# Altium PCB W040 24011506-06PBS PCB.PcbDoc (part 3 of 3)
Units mil, origin at the board's own origin, x right, y up, seen from the top; angles counter-clockwise.
Board outline 4320.55 x 590.55 mil, 4 copper layers (Top Layer, MidLayer1, MidLayer2, Bottom Layer); 218 components, 121 nets, 685 pads, 487 vias.
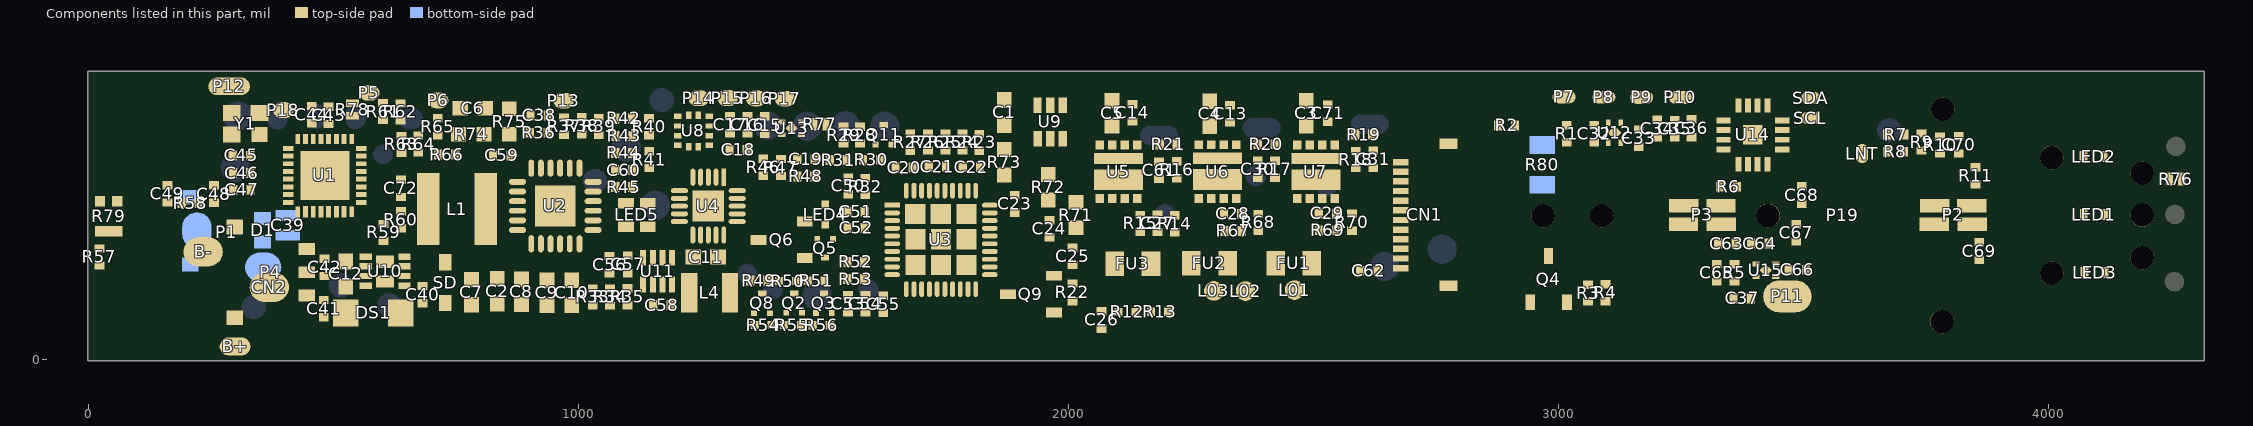
[diagram p5: the components of this part, seen from the top]

## Polygon pours and split planes (outlines as drawn)
GND on Top Layer "Top Layer-GND" (hatched 90Degree grid 4 track 4, remove dead copper, pour order 50): 1998.43,11.44 1768.45,11.44 cw(c1768.45,25.31) 1758.64,15.5 1758.64,38.25 ccw(c1748.68,38.25) 1755.73,45.29 1753.04,47.98 ccw(c1747.7,42.64) 1747.7,50.19 1600.82,50.19 ccw(c1600.82,37.38) 1591.77,46.44 ccw(c1598.81,39.4) 1588.85,39.4 1588.85,30.19 1588.85,18.97 cw(c1581.74,18.97) 1586.77,13.94 cw(c1582.74,17.96) 1582.74,12.27 1570.1,12.27 720.63,12.27 cw(c720.63,28.63) 709.06,17.06 cw(c713.59,21.59) 707.18,21.59 707.18,30.81 707.18,44.72 ccw(c684.42,44.72) 700.52,60.81 655.4,60.81 ccw(c655.4,39.47) 640.31,54.56 ccw(c641.31,53.56) 639.89,53.56 639.89,18.73 cw(c631.84,18.73) 637.53,13.04 635.93,11.44 504.22,11.44 cw(c504.22,21.4) 497.18,14.35 497.18,37.21 ccw(c482.96,37.21) 493.02,47.27 489.86,50.43 cw(c491.28,51.85) 489.27,51.85 344.7,51.85 ccw(c344.7,27.67) 327.6,44.77 327.6,23.72 cw(c319.06,23.72) 325.1,17.69 cw(c312.02,30.77) 312.02,12.27 311.35,12.27 281.72,12.27 cw(c281.72,22.23) 274.68,15.19 cw(c282.73,23.24) 271.35,23.24 271.35,40.19 271.35,163.76 ccw(c249.3,163.76) 264.89,179.35 24.25,179.35 cw(c24.25,196.43) 12.18,184.35 12.18,194.81 cw(c22.14,194.81) 15.1,201.85 159.34,201.85 ccw(c159.34,204.7) 161.35,202.69 161.35,339.77 161.35,387.24 ccw(c154.24,387.24) 159.27,392.27 32.87,392.27 ccw(c32.87,386.58) 28.85,390.6 cw(c25.83,387.59) 30.1,387.59 30.1,339.77 30.1,320.46 ccw(c35.79,320.46) 31.77,316.44 20.2,316.44 cw(c20.2,320.71) 17.18,317.69 ccw(c13.16,321.71) 18.85,321.71 18.85,377.27 18.85,390.26 ccw(c16,390.26) 18.02,392.27 14.44,392.27 cw(c14.44,393.69) 13.43,392.69 13.43,414.4 cw(c23.39,414.4) 16.35,421.44 229.08,421.44 ccw(c229.08,447.04) 247.18,428.94 247.18,563.29 cw(c262.83,563.29) 251.77,574.35 cw(c256.8,569.33) 256.8,576.44 316.35,576.44 cw(c316.35,567.38) 322.75,573.79 326.77,569.77 cw(c321.74,564.74) 328.85,564.74 328.85,556.44 328.85,550.07 ccw(c341.65,550.07) 332.6,541.02 488.89,541.02 ccw(c488.89,550.98) 495.93,543.94 ccw(c490.9,548.97) 498.02,548.97 498.02,578.1 1570.39,578.1 cw(c1570.39,566.72) 1578.43,574.77 1585.8,567.4 cw(c1574.42,556.02) 1590.52,556.02 1590.52,553.68 ccw(c1609.01,553.68) 1595.93,540.6 1747.37,540.6 ccw(c1747.37,556.25) 1758.43,545.19 1758.43,574.91 cw(c1764.12,574.91) 1760.1,578.94 3726.42,578.94 cw(c3726.42,576.09) 3728.43,578.1 3805.1,560.4 3837.6,551.23 3864.06,545.81 3889.68,542.69 3909.48,541.65 3967.18,540.81 3975.52,535.81 3975.52,493.53 ccw(c3987.61,493.53) 3979.06,484.98 ccw(c3986.6,492.52) 3986.6,481.85 4005.31,481.85 4294.83,481.85 cw(c4294.83,476.16) 4298.85,480.19 4298.85,120.79 cw(c4285.34,120.79) 4294.89,111.23 4219.28,111.23 cw(c4219.28,123.32) 4210.73,114.77 cw(c4219.28,123.32) 4207.18,123.32 4207.18,130.4 4207.18,157.51 ccw(c4193.67,157.51) 4203.23,167.06 ccw(c4198.7,162.54) 4198.7,168.94 4196.35,168.94 4156.51,168.94 ccw(c4156.51,150.44) 4143.43,163.52 4143.43,115.63 cw(c4136.32,115.63) 4141.35,110.6 3992.55,110.6 ccw(c3992.55,83.58) 3973.43,102.69 3973.43,58.38 cw(c3967.74,58.38) 3971.77,54.35 3964.06,51.85 3946.14,51.85 3905.93,51.23 3880.73,48.31 3858.64,45.19 3827.18,37.9 3800.93,30.4 3774.48,22.69 3752.6,18.52 3734.89,15.4 3722.81,13.1 3663.64,11.23
GND on Top Layer "Top Layer-GND 1" (hatched 90Degree grid 4 track 4, remove dead copper, pour order 48): 3466.1,362.97 3435.78,362.97 cw(c3435.78,367.23) 3432.77,364.22 3425.54,371.44 cw(c3431.23,377.13) 3423.18,377.13 3435.83,377.13 ccw(c3435.83,382.82) 3439.85,378.8 3439.85,413.11 cw(c3445.54,413.11) 3441.52,417.13 3476.24,417.13 ccw(c3476.24,422.82) 3480.27,418.8 3491.42,418.8 cw(c3491.42,414.53) 3494.43,417.55 cw(c3509.52,417.55) 3498.85,428.22 3517.35,446.72 3569.48,446.72 cw(c3569.48,436.76) 3576.52,443.8 3577.86,442.46 cw(c3570.03,434.63) 3581.1,434.63 3581.1,424.82 ccw(c3606.71,424.82) 3588.6,406.72 ccw(c3591.62,409.73) 3591.62,405.47 3599.85,405.47 3599.85,402.9 cw(c3597,402.9) 3599.02,400.88 cw(c3597,402.9) 3597,400.05 3562.77,400.05 3539,400.05 ccw(c3539,382.98) 3526.93,395.05 3502.16,370.27 cw(c3498.6,373.83) 3498.6,368.8 3484.95,368.8 ccw(c3484.95,364.53) 3481.93,367.55 3481.93,362.72 cw(c3480.51,362.72) 3481.52,361.72
GND on Top Layer "Top Layer-GND 2" (hatched 90Degree grid 4 track 4, remove dead copper, pour order 46): 3693.6,255.05 3571.69,255.05 cw(c3571.69,256.47) 3570.68,255.47 3570.68,335.29 cw(c3572.11,335.29) 3571.1,336.3 3725.65,336.3 cw(c3725.65,329.19) 3730.68,334.22 3730.68,294.49 ccw(c3736.37,294.49) 3732.35,290.47 3791.9,290.47 cw(c3791.9,283.35) 3796.93,288.38 3796.93,261.5 cw(c3788.4,261.5) 3794.43,255.47
NetC66_1 on Top Layer "Top Layer-NetU15_3" (hatched 90Degree grid 4 track 4, remove dead copper, pour order 44): 3466.93,97.55 3433,97.55 cw(c3433,113.2) 3421.93,102.13 3415.64,108.43 cw(c3425.6,118.38) 3411.52,118.38 3411.52,148.11 cw(c3417.21,148.11) 3413.18,152.13 3435.24,174.19 cw(c3442.35,167.07) 3442.35,177.13 3459.68,177.13 ccw(c3459.68,178.56) 3460.68,177.55 ccw(c3453.64,184.59) 3463.6,184.59 3463.6,191.3 3476.34,191.3 ccw(c3476.34,192.72) 3477.35,191.72 3477.35,183.93 ccw(c3488.73,183.93) 3480.68,175.88 3514.06,142.51 cw(c3504.1,132.55) 3518.18,132.55 3518.18,122.37 cw(c3502.53,122.37) 3513.6,111.3 3504.74,102.44 cw(c3491.93,115.24) 3491.93,97.13
GND on Top Layer "Top Layer-GND 3" (hatched 90Degree grid 4 track 4, remove dead copper, pour order 42): 3199.43,255.05 3061.62,255.05 cw(c3061.62,259.32) 3058.6,256.3 3058.6,329.85 cw(c3067.14,329.85) 3061.1,335.88 3210.97,335.88 cw(c3210.97,324.5) 3219.02,332.55 3219.02,288.8 3281.42,288.8 cw(c3281.42,284.53) 3284.43,287.55 3284.43,263.69 cw(c3271.63,263.69) 3280.68,254.63
no net on Top Layer "Top Layer-No Net" (hatched 90Degree grid 4 track 4, remove dead copper, pour order 40): 2970.27,252.13 2954.85,252.13 2945.27,261.72 2945.27,266.3 2949.43,270.47 2950.18,269.72 ccw(c2965.47,285.01) 2965.47,263.38 2972.68,263.38 ccw(c2972.68,284.72) 2987.77,269.63 cw(c2987.77,258.07) 2995.95,266.25 2996.52,265.68 cw(c2981.93,251.09) 3002.56,251.09 3002.56,245.26 3002.14,245.68 ccw(c2987.56,231.1) 2987.56,251.72 2974.02,251.72
VC1 on Top Layer "Top Layer-VC1" (hatched 90Degree grid 4 track 4, remove dead copper, pour order 38): 2199.02,475.47 2160.68,475.47 2152.35,467.13 2133.18,467.13 2122.77,456.72 2122.77,422.97 2123.6,422.13 2149.85,422.13 2151.93,420.05 2151.93,402.55 2150.68,401.3 2053.18,401.3 2053.18,442.97 2028.18,467.97 2004.02,492.13 2001.93,492.13 1991.52,502.55 1981.52,502.55 1915.68,502.55 1911.1,507.13 1911.1,527.97 1919.02,535.88 2022.77,535.88 2046.1,512.55 2066.52,492.13 2117.77,492.13 2142.77,492.13 2158.18,507.55 2246.52,507.55 2259.85,494.22 2261.1,492.97 2291.93,492.97 2344.43,492.97 2356.52,505.05 2448.6,505.05 2462.35,491.3 2541.93,491.3 2546.1,487.13 2546.1,477.55 2538.6,470.05 2526.52,457.97 2526.52,432.13 2526.52,422.13 2527.77,420.88 2555.27,420.88 2555.68,421.3 2555.68,403.38 2554.02,401.72 2455.27,401.72 2454.85,402.13 2454.85,423.8 2456.52,425.47 2456.52,455.88 2436.52,475.88 2366.1,475.88 2357.35,467.13 2338.6,467.13 2327.35,455.88 2325.27,453.8 2325.27,422.97 2326.52,422.97 2327.77,421.72 2355.27,421.72 2356.1,420.88 2356.1,405.05 2353.6,402.55 2351.1,400.05 2254.85,400.05 2254.85,421.3 2258.18,424.63 2258.18,462.55 2244.43,476.3 2203.6,476.3
NetC23_1 on Top Layer "Top Layer-NetU3_28" (hatched 90Degree grid 4 track 4, remove dead copper, pour order 36): 2724.64,325.26 2736.68,325.26 cw(c2736.68,314.59) 2744.22,322.13 2744.22,311.67 cw(c2734.27,311.67) 2741.31,304.63 2705.03,304.63 ccw(c2705.03,291.12) 2695.47,300.68 2662.74,300.68 ccw(c2662.74,287.16) 2653.18,296.72 cw(c2649.16,300.74) 2649.16,295.05 2622.14,295.05 cw(c2629.18,302.09) 2619.22,302.09 2619.22,303.18 2619.22,320.31 cw(c2637.72,320.31) 2624.64,333.38 2653.31,333.38 cw(c2653.31,324.14) 2659.85,330.68 2690.26,330.68 cw(c2690.26,318.58) 2698.81,327.13 ccw(c2700.82,329.15) 2700.82,326.3 2702.56,326.3
NetC24_1 on Top Layer "Top Layer-NetU3_24" (hatched 90Degree grid 4 track 4, remove dead copper, pour order 34): 2661.52,345.68 2661.52,366.23 cw(c2667.21,366.23) 2663.18,370.26 2699.05,370.26 ccw(c2699.05,371.68) 2700.06,370.68 cw(c2706.6,364.14) 2706.6,373.38 2718.18,373.38 2743.91,373.38 cw(c2743.91,357.02) 2755.47,368.59 2755.47,344.97 cw(c2744.09,344.97) 2752.14,336.93 2702.5,336.93 cw(c2702.5,343.33) 2697.97,338.8 2662.82,338.8 cw(c2662.82,340.93) 2661.31,339.43
NetC29_1 on Top Layer "Top Layer-NetR26_2" (hatched 90Degree grid 4 track 4, remove dead copper, pour order 32): 2479.02,188.8 2479.02,244.95 ccw(c2474.75,244.95) 2477.77,247.97 2463.97,261.76 cw(c2473.93,271.72) 2459.85,271.72 2459.85,338.25 cw(c2462.7,338.25) 2460.68,340.26 cw(c2461.69,339.25) 2461.69,340.68 2474.43,340.68 2475.24,339.87 ccw(c2476.31,340.93) 2476.31,339.43 ccw(c2477.82,340.93) 2477.82,338.8 2485.27,338.8 2485.27,339.17 cw(c2487.4,339.17) 2485.89,340.68 2500.01,340.68 cw(c2500.01,338.54) 2501.52,340.05 ccw(c2503.53,342.06) 2503.53,339.22 2509.64,339.22 2510.28,339.85 cw(c2512.77,337.36) 2512.77,340.88 2523.71,340.88 cw(c2523.71,336.62) 2526.72,339.63 2526.72,321.82 cw(c2522.46,321.82) 2525.47,318.8 2523.96,317.29 ccw(c2536.41,304.84) 2518.81,304.84 2518.81,180.18 cw(c2507.43,180.18) 2515.47,172.13 cw(c2514.47,173.14) 2514.47,171.72 2481.72,171.72 cw(c2481.72,173.73) 2480.3,172.31 2479.22,173.38
NetC27_1 on Top Layer "Top Layer-NetR24_2" (hatched 90Degree grid 4 track 4, remove dead copper, pour order 30): 2441.93,212.13 2441.93,177.34 cw(c2433.4,177.34) 2439.43,171.3 cw(c2427.36,183.37) 2427.36,166.3 2424.43,166.3 ccw(c2417.39,159.26) 2417.39,169.22 2403.6,169.22 2398.93,169.22 cw(c2398.93,189.13) 2384.85,175.05 2384.85,231 cw(c2397.65,231) 2388.6,240.05 cw(c2390.61,238.04) 2390.61,240.88 2435.68,240.88 cw(c2435.68,235.85) 2439.24,239.41 2442.77,235.88
NetC28_1 on Top Layer "Top Layer-NetR23_2" (hatched 90Degree grid 4 track 4, remove dead copper, pour order 28): 2306.1,189.22 2306.1,226.73 ccw(c2289.03,226.73) 2301.1,238.8 2262.33,277.57 cw(c2267.31,282.55) 2260.27,282.55 2260.27,338.87 cw(c2263.11,338.87) 2261.1,340.88 ccw(c2263.11,342.9) 2263.11,340.05 2325.27,340.05 2325.27,266.29 ccw(c2342.34,266.29) 2330.27,254.22 2338.64,245.84 cw(c2328.68,235.88) 2342.77,235.88 2342.77,175.57 cw(c2338.5,175.57) 2341.52,172.55 2308.7,172.55 cw(c2308.7,176.82) 2305.68,173.8
NetC27_1 on Top Layer "Top Layer-NetR24_2 1" (hatched 90Degree grid 4 track 4, remove dead copper, pour order 26): 2210.27,152.55 2162.88,152.55 cw(c2162.88,168.91) 2151.31,157.34 2151.31,210.03 ccw(c2135.66,210.03) 2146.72,221.09 2135.93,231.88 ccw(c2131.31,227.26) 2131.31,233.8 2090.44,233.8 cw(c2090.44,285.01) 2054.22,248.8 2054.22,330.2 cw(c2068.45,330.2) 2058.39,340.26 2071.05,340.26 cw(c2071.05,338.12) 2072.56,339.63 ccw(c2074.07,341.14) 2074.07,339.01 2082.35,339.01 cw(c2083.86,339.01) 2082.79,340.08 2083.81,341.09 2095.37,341.09 cw(c2095.37,336.82) 2098.39,339.84 ccw(c2100.4,341.85) 2100.4,339.01 2107.56,339.01 2108.34,339.79 cw(c2110.47,337.66) 2110.47,340.68 2117.81,340.68 cw(c2117.81,330.72) 2124.85,337.76 2124.85,288.71 ccw(c2132.67,288.71) 2127.14,283.18 2130.9,279.42 ccw(c2139.43,287.95) 2139.43,275.88 2185.27,275.88 cw(c2185.27,267.35) 2191.31,273.38 cw(c2184.77,266.84) 2194.02,266.84 2194.02,265.47 2194.02,245.58 ccw(c2210.38,245.58) 2198.81,234.01 ccw(c2202.33,237.53) 2202.33,232.55 2214.64,232.55 2254.29,232.55 cw(c2254.29,217.61) 2264.85,228.18 cw(c2253.78,217.11) 2269.43,217.11 2269.43,214.84 2269.43,175.48 ccw(c2272.99,175.48) 2270.47,172.97 2270.47,166.9 cw(c2265.5,166.9) 2269.02,163.38 2268.81,163.18 cw(c2262.77,169.23) 2262.77,160.68 2258.04,160.68 ccw(c2258.04,154.98) 2254.02,159.01 2249.12,154.11 cw(c2244.85,158.38) 2244.85,152.34
GND on Top Layer "Top Layer-GND 4" (hatched 90Degree grid 4 track 4, remove dead copper, pour order 24): 2096.1,147.55 2029.29,147.55 cw(c2029.29,153.24) 2025.27,149.22 2025.27,153.32 cw(c2030.96,153.32) 2026.93,157.34 2029.57,159.97 cw(c2032.77,156.77) 2032.77,161.3 2044.02,161.3 ccw(c2044.02,169.84) 2050.06,163.8 2051.51,165.25 ccw(c2039.42,177.34) 2056.52,177.34 2056.52,177.61 ccw(c2041.58,177.61) 2052.14,188.18 2052.14,189.65 cw(c2057.12,189.65) 2053.6,193.18 2057.62,197.19 ccw(c2051.21,203.59) 2060.27,203.59 2060.27,210.98 ccw(c2052.44,210.98) 2057.97,216.51 2054.71,219.78 ccw(c2049.02,214.09) 2049.02,222.13 2049.02,226.2 cw(c2053.28,226.2) 2050.27,229.22 2051.06,230.01 ccw(c2046.44,234.63) 2052.97,234.63 2057.53,234.63 ccw(c2057.53,241.75) 2062.56,236.72 2064.25,238.4 cw(c2069.22,233.43) 2069.22,240.47 cw(c2069.22,232.92) 2074.56,238.26 2075.68,237.13 cw(c2072.67,234.12) 2076.93,234.12 2076.93,231.09 2076.93,226.72 ccw(c2079.45,229.23) 2079.45,225.68 2113.39,225.68 2113.39,156.49 ccw(c2118.37,156.49) 2114.85,152.97 cw(c2113.34,151.46) 2115.47,151.46 2115.47,149.43 cw(c2112.46,152.44) 2112.46,148.18 2110.27,148.18
NetC25_1 on Top Layer "Top Layer-NetU3_21" (hatched 90Degree grid 4 track 4, remove dead copper, pour order 22): 2612.77,348.38 2456.86,348.38 cw(c2456.86,351.23) 2454.85,349.22 ccw(c2451.83,352.23) 2456.1,352.23 2456.1,356.09 cw(c2456.1,357.6) 2455.03,356.53 2453.39,358.18 2453.39,381.88 cw(c2464.06,381.88) 2456.52,389.43 2605.05,389.43 ccw(c2605.05,401.52) 2613.6,392.97 2624.18,403.55 cw(c2634.85,392.88) 2634.85,407.97 2692.84,407.97 cw(c2692.84,405.12) 2694.85,407.13 2694.85,384.07 cw(c2689.16,384.07) 2693.18,380.05 2668.03,380.05 ccw(c2668.03,357.29) 2651.93,373.38 2627.94,349.39 cw(c2626.52,350.81) 2626.52,348.8
NetC24_1 on Top Layer "Top Layer-NetU3_24 1" (hatched 90Degree grid 4 track 4, remove dead copper, pour order 20): 2385.68,385.05 2419.1,385.05 cw(c2419.1,365.13) 2433.18,379.22 2433.18,366.75 cw(c2426.07,366.75) 2431.1,361.72 cw(c2424.06,361.72) 2429.04,356.74 2424.02,351.72 2344.05,351.72 ccw(c2344.05,344.6) 2339.02,349.63 cw(c2341.03,351.65) 2338.18,351.65 2338.18,389.22
NetC23_1 on Top Layer "Top Layer-NetU3_28 1" (hatched 90Degree grid 4 track 4, remove dead copper, pour order 18): 2181.1,384.22 2223.89,384.22 cw(c2223.89,372.84) 2231.93,380.88 2231.93,365.32 cw(c2226.24,365.32) 2230.27,361.3 2229.79,360.82 cw(c2214.85,375.76) 2214.85,354.63 2153.36,354.63 ccw(c2153.36,353.21) 2152.35,354.22 2152.35,353.83 cw(c2145.24,353.83) 2150.27,348.8 2061.23,348.8 cw(c2061.23,360.18) 2053.18,352.13 2053.18,380.51 cw(c2063.14,380.51) 2056.1,387.55 2147.74,387.55 cw(c2147.74,380.44) 2152.77,385.47
NetC58_2 on Top Layer "Top Layer-NetU11_8" (hatched 90Degree grid 4 track 4, remove dead copper, pour order 16): 1243.18,167.13 1243.18,101.93 1240.47,99.22 1210.47,99.22 1210.06,99.63 1210.06,102.55 1209.22,103.38 1181.52,103.38 1181.1,102.97 1181.1,121.72 1181.31,121.93 1184.22,121.93 1185.27,122.97 1185.27,166.72 1186.93,168.38 1202.56,168.38 1209.22,175.05 1210.89,176.72 1220.68,176.72 1242.35,176.72 1243.18,175.88
VC1 on Top Layer "Top Layer-VC1 1" (hatched 90Degree grid 4 track 4, remove dead copper, pour order 14): 965.27,147.13 928.07,147.13 cw(c928.07,159.94) 919.02,150.88 919.02,176.72 939.02,196.72 939.02,201.3 943.6,205.88 944.43,206.72 944.43,220.88 943.6,220.88 938.6,225.88 938.6,253.8 940.27,255.47 966.52,255.47 969.43,252.55 969.43,210.88 971.1,209.22 1013.18,209.22 1020.27,216.3 1046.93,242.97 1078.6,242.97 1161.52,242.97 1166.93,237.55 1175.27,229.22 1175.27,217.97 1175.27,195.05 1174.02,193.8 1173.18,194.63 1148.18,194.63 1148.18,226.72 1144.02,230.88 1143.18,230.05 1133.6,230.05 1122.35,230.05 1120.68,228.38 1080.68,228.38 1075.27,222.97 1075.27,209.22 1071.93,205.88 1048.6,205.88 1039.02,196.3 1037.77,195.05 1022.35,195.05 1016.1,195.05 1004.85,183.8 999.85,178.8 999.85,148.38
GND on Top Layer "Top Layer-GND 5" (hatched 90Degree grid 4 track 4, remove dead copper, pour order 12): 1001.93,307.97 1001.93,278.37 cw(c984.86,278.37) 996.93,266.3 908.14,266.3 ccw(c908.14,256.34) 901.1,263.38 899.72,263.38 ccw(c899.72,254.14) 893.18,260.68 890.77,258.27 ccw(c897.53,251.51) 887.97,251.51 887.97,241.59 cw(c878.73,241.59) 885.27,235.05 855.1,204.89 cw(c844.43,215.56) 844.43,200.47 827.8,200.47 ccw(c827.8,193.35) 822.77,198.38 cw(c818.74,202.41) 818.74,196.72 816.1,196.72 816.1,221.76 cw(c826.06,221.76) 819.02,228.8 837.74,228.8 ccw(c837.74,235.91) 842.77,230.88 842.77,256.69 cw(c849.88,256.69) 844.85,261.72 851.95,268.82 cw(c856.93,263.84) 856.93,270.88 889.96,270.88 ccw(c889.96,283.69) 899.02,274.63 904.04,279.65 ccw(c899.06,284.63) 906.1,284.63 906.1,361.54 cw(c907.52,361.54) 906.52,362.55 996.07,362.55 cw(c996.07,355.44) 1001.1,360.47
NetC2_2 on Top Layer "Top Layer-NetU2_19" (hatched 90Degree grid 4 track 4, remove dead copper, pour order 10): 910.27,172.97 910.27,155.47 905.68,150.88 818.6,150.88 816.1,153.38 816.1,177.55 829.02,190.47 853.6,190.47 882.35,219.22 898.6,235.47 898.6,250.05 903.18,254.63 910.27,254.63 924.43,254.63 929.02,250.05 929.02,219.63 934.85,213.8 cw(c925.8,213.8) 932.2,207.4 922.77,197.97 913.09,188.29 ccw(c920.92,180.47) 909.85,180.47
NetC59_1 on Top Layer "Top Layer-NetU2_15" (hatched 90Degree grid 4 track 4, remove dead copper, pour order 8): 808.18,238.13 765.68,238.13 753.18,250.63 753.18,373.55 763.6,383.97 829.85,383.97 829.85,381.05 830.68,380.22 831.93,380.22 833.18,378.97 833.18,332.3 835.27,330.22 890.27,330.22 894.85,325.63 894.85,282.72 891.52,279.38 851.93,279.38 843.18,270.63 833.6,261.05 833.6,238.55
NetC7_2 on Top Layer "Top Layer-NetL1_1" (hatched 90Degree grid 4 track 4, remove dead copper, pour order 6): 741.1,147.13 635.89,147.13 632.77,150.26 632.77,175.26 634.02,176.51 661.31,176.51 673.18,188.38 673.18,377.97 674.85,379.63 713.6,379.63 714.85,378.38 714.85,224.63 723.6,215.88 738.18,215.88 740.68,213.38 740.68,197.97 740.27,197.55 761.93,197.55 776.1,183.38 793.18,183.38 796.52,180.05 796.52,149.22 794.02,146.72
NetC12_1 on Top Layer "Top Layer-NetU10_4" (hatched 90Degree grid 4 track 4, remove dead copper, pour order 4): 499.02,101.3 499.02,130.05 504.64,135.68 504.64,169.43 507.14,171.93 554.02,171.93 555.06,172.97 555.06,175.47 556.52,176.93 577.56,176.93 578.18,176.3 578.6,175.88 578.6,171.93 623.18,171.93 623.18,150.88 621.93,149.63 577.77,149.63 577.14,149.01 562.97,149.01 550.27,136.3 550.27,127.13 550.27,45.88 542.14,37.76 540.89,36.51 531.52,36.51 499.22,68.8 499.22,70.47
VC1 on Top Layer "Top Layer-VC1 2" (hatched 90Degree grid 4 track 4, remove dead copper, pour order 2): 378.14,89.25 359.81,89.25 338.35,110.71 327.31,121.75 327.31,123.83 322.1,123.83 318.56,127.37 316.47,129.46 316.47,134.66 316.47,134.87 321.27,139.66 321.47,139.46 328.97,139.46 328.97,163 346.89,180.91 398.56,180.91 406.89,172.58 435.64,143.83 451.89,143.83 461.47,143.83 462.72,142.58 462.72,118.21 455.64,111.12 455.23,110.71 407.31,110.71 386.06,89.46 377.72,89.46
GND on MidLayer1 "MidLayer1-GND" (hatched 90Degree grid 4 track 4, remove dead copper, pour order 52): 1866.52,9.63 1758.6,9.63 1757.77,10.47 1757.77,31.87 ccw(c1735.01,31.87) 1751.1,47.97 1744.22,47.97 cw(c1744.22,56.5) 1738.18,50.47 1724.22,50.47 ccw(c1724.22,41.93) 1718.18,47.97 1623.36,47.97 cw(c1623.36,49.39) 1622.35,48.38 1608.7,48.38 ccw(c1608.7,44.12) 1605.68,47.13 1601.33,47.13 ccw(c1601.33,31.48) 1590.27,42.55 1590.27,27.91 cw(c1563.24,27.91) 1582.35,8.8 711.04,8.8 cw(c711.04,15.2) 706.52,10.68 706.52,48.25 ccw(c695.14,48.25) 703.18,56.3 ccw(c693.63,46.74) 693.63,60.26 661.18,60.26 ccw(c661.18,30.38) 640.06,51.51 640.06,17.94 cw(c626.54,17.94) 636.1,8.38 502.31,8.38 cw(c502.31,18.34) 495.27,11.3 495.27,39.16 ccw(c481.04,39.16) 491.1,49.22 353.43,49.22 ccw(c353.43,9.38) 325.27,37.55 ccw(c337.34,25.48) 320.27,25.48 320.27,24.22 317.03,20.98 cw(c289.64,48.36) 289.64,9.63 279.43,9.63 cw(c279.43,18.17) 273.39,12.13 cw(c278.92,17.67) 271.1,17.67 271.1,25.88 271.1,169.68 ccw(c261.14,169.68) 268.18,176.72 260.22,176.72 cw(c260.22,186.67) 253.18,179.63 36.32,179.63 cw(c36.32,212.35) 13.18,189.22 13.18,194.78 cw(c18.87,194.78) 14.85,198.8 155.48,198.8 ccw(c155.48,207.34) 161.52,201.3 161.52,387.2 ccw(c158.67,387.2) 160.68,389.22 17.62,389.22 cw(c17.62,394.91) 13.6,390.88 13.6,417.45 cw(c17.87,417.45) 14.85,420.47 211.9,420.47 cw(c211.9,413.35) 216.93,418.38 227.58,418.38 ccw(c227.58,443.99) 245.68,425.88 245.68,452.79 ccw(c244.26,452.79) 245.27,453.8 245.27,566.41 cw(c258.07,566.41) 249.02,575.47 310.24,575.47 cw(c310.24,568.35) 315.27,573.38 324.13,564.52 cw(c311.33,551.72) 329.43,551.72 329.43,548.69 ccw(c342.24,548.69) 333.18,539.63 ccw(c343.24,549.69) 343.24,535.47 361.1,535.47 cw(c366.13,530.44) 366.13,537.55 376.93,537.55 457.49,537.55 cw(c457.49,531.86) 461.52,535.88 476.81,535.88 ccw(c476.81,564.34) 496.93,544.22 496.93,570.26 cw(c505.47,570.26) 499.43,576.3 1587.59,576.3 cw(c1587.59,574.88) 1588.6,575.88 1588.6,556.73 ccw(c1612.78,556.73) 1595.68,539.63 1746.28,539.63 ccw(c1746.28,555.28) 1757.35,544.22 1757.35,565.65 cw(c1773,565.65) 1761.93,576.72 3717.35,576.72 3748.18,572.55 3771.72,567.97 3799.43,561.93 3832.77,551.3 3855.27,546.93 3880.27,542.76 3935.68,539.22 3969.85,538.8 cw(c3969.85,533.77) 3973.41,537.33 3976.31,534.43 3976.31,496.09 ccw(c3996.94,496.09) 3982.35,481.51 ccw(c3986.88,486.04) 3986.88,479.63 4010.89,479.63 cw(c4013.41,477.12) 4013.41,480.68 4021.52,480.68 4294.32,480.68 cw(c4294.32,472.85) 4299.85,478.38 4299.85,116.5 cw(c4291.31,116.5) 4297.35,110.47 4215.81,110.47 cw(c4215.81,121.85) 4207.77,113.8 4207.77,158.08 ccw(c4194.96,158.08) 4204.02,167.13 ccw(c4193.96,157.07) 4193.96,171.3 4175.68,171.3 4164.55,171.3 ccw(c4164.55,142.85) 4144.43,162.97 ccw(c4146.45,160.95) 4143.6,160.95 4143.6,110.88 3994.75,110.88 ccw(c3994.75,85.99) 3977.14,103.59 3977.14,61.22 cw(c3965.76,61.22) 3973.81,53.18 3968.6,50.05 3938.39,50.05 3878.39,47.13 3842.35,40.47 3820.68,34.84 3802.14,29.84 3789.02,25.68 3766.52,20.05 3752.97,17.76 3737.35,15.05 3719.02,12.34 3677.77,11.09
VC3 on MidLayer2 "MidLayer2-VC3" (hatched 90Degree grid 4 track 4, remove dead copper, pour order 56): 839.22,474.43 774.41,474.43 ccw(c774.41,460.91) 764.85,470.47 749.14,454.76 cw(c743.81,460.09) 743.81,452.55 602.8,452.55 cw(c602.8,509.45) 562.56,469.22 555.44,476.34 ccw(c546.72,467.62) 546.72,479.95 546.72,504.51 cw(c550.28,504.51) 547.77,507.03 552.18,511.44 cw(c556.62,506.99) 556.62,513.28 566.27,513.28 cw(c566.27,508.66) 569.54,511.93 574.32,507.15 ccw(c592.45,525.28) 592.45,499.63 1394.51,499.63 ccw(c1394.51,511.01) 1402.56,502.97 1408.82,509.23 cw(c1411.31,506.74) 1411.31,510.26 1481.87,510.26 ccw(c1481.87,524.48) 1491.93,514.43 1519.85,542.34 1520.06,542.34 1590.98,542.34 cw(c1590.98,534.52) 1596.52,540.05 1747.15,540.05 ccw(c1747.15,548.59) 1753.18,542.55 3688.17,542.55 cw(c3688.17,538.99) 3690.68,541.51 3746.28,485.91 ccw(c3753.39,493.03) 3753.39,482.97 3918.64,482.97 cw(c3918.64,473.01) 3925.68,480.05 3961.02,444.71 ccw(c3970.27,453.96) 3970.27,440.88 4224.13,440.88 cw(c4224.13,428.08) 4233.18,437.13 4252.91,417.41 cw(c4247.22,411.72) 4255.27,411.72 4255.27,377.9 cw(c4252.42,377.9) 4254.43,375.88 4244.58,366.04 cw(c4238.18,372.44) 4238.18,363.38 3867.21,363.38 cw(c3867.21,369.07) 3863.18,365.05 3863.18,405.16 ccw(c3850.38,405.16) 3859.43,414.22 3848.97,424.68 ccw(c3839.02,414.72) 3839.02,428.8 3745.33,428.8 cw(c3745.33,443.03) 3735.27,432.97 3680.82,487.41 ccw(c3657.35,463.94) 3657.35,497.13 3078.93,497.13 ccw(c3078.93,477.22) 3064.85,491.3 3058.92,485.37 ccw(c3066.75,477.55) 3055.68,477.55 3055.68,422.58 cw(c3048.57,422.58) 3053.6,417.55 3042.5,406.45 cw(c3036.1,412.85) 3036.1,403.8 3010.28,403.8 cw(c3010.28,415.89) 3001.72,407.34 2996.28,412.79 cw(c3003.75,420.26) 2993.18,420.26 2993.18,471.32 ccw(c2988.2,471.32) 2991.72,474.84 ccw(c2978.14,474.84) 2987.75,484.44 2975.89,496.3 2935.05,496.3 cw(c2935.05,504.84) 2929.02,498.8 2911.03,516.79 ccw(c2908.18,513.94) 2908.18,517.97 1636.5,517.97 ccw(c1636.5,500.9) 1624.43,512.97 1610.37,498.9 cw(c1606.1,503.17) 1606.1,497.13 1422.58,497.13 ccw(c1422.58,481.48) 1411.52,492.55 1408.85,489.89 cw(c1398.18,500.56) 1398.18,485.47 1374.98,485.47 ccw(c1374.98,474.09) 1366.93,482.13 1261.15,376.35 cw(c1259.02,378.48) 1259.02,375.47 1257.41,375.47 ccw(c1257.41,361.24) 1247.35,371.3 1166.37,290.32 cw(c1160.68,296.01) 1160.68,287.97 1095.27,287.97 1095.06,287.76 1087.57,295.24 cw(c1091.13,298.8) 1086.1,298.8 1086.1,353.02 cw(c1092.5,353.02) 1087.97,357.55 1088.88,358.45 ccw(c1065.4,381.93) 1098.6,381.93 1098.6,387.28 cw(c1104.29,387.28) 1100.27,391.3 1112.78,403.81 cw(c1115.27,401.32) 1115.27,404.84 ccw(c1115.27,456.14) 1151.54,419.87 1154.64,422.97 1106.29,471.32 ccw(c1095.27,460.29) 1095.27,475.88
VC1 on MidLayer2 "MidLayer2-VC1" (hatched 90Degree grid 4 track 4, remove dead copper, pour order 54): 628.33,87.47 535.74,87.47 cw(c535.74,89.24) 534.48,87.99 ccw(c530.71,84.22) 530.71,89.55 528.96,89.55 526.16,89.55 ccw(c526.16,81.73) 520.63,87.26 452.01,87.26 cw(c452.01,90.1) 450,88.09 ccw(c445.98,84.07) 445.98,89.76 415.83,89.76 365.58,89.76 cw(c365.58,99.72) 358.54,92.68 355.58,95.64 cw(c359.49,99.55) 353.96,99.55 353.96,126.53 cw(c358.23,126.53) 355.21,129.55 396.72,171.06 cw(c409.17,158.61) 409.17,176.22 809.06,176.22 ccw(c809.06,192.58) 820.63,181.01 841.51,201.89 cw(c845.42,197.98) 845.42,203.51 982.98,203.51 cw(c982.98,188.57) 993.54,199.13 993.54,119.49 ccw(c999.94,119.49) 995.42,114.97 1002.85,107.54 ccw(c1014.58,119.27) 1014.58,102.68 1262.46,102.68 ccw(c1262.46,113.34) 1270,105.8 1277.89,113.69 ccw(c1270.78,120.8) 1280.83,120.8 1280.83,345.5 cw(c1293.64,345.5) 1284.58,354.55 1382.4,452.37 cw(c1386.67,448.1) 1386.67,454.13 1410.38,454.13 ccw(c1410.38,473.34) 1423.96,459.76 1426.63,462.43 cw(c1431.25,457.8) 1431.25,464.34 1614.72,464.34 ccw(c1614.72,482.12) 1627.29,469.55 1642.48,484.73 cw(c1643.54,483.67) 1643.54,485.18 2076.1,485.18 cw(c2076.1,478.77) 2080.63,483.3 2080.63,451.4 cw(c2075.65,451.4) 2079.17,447.88 ccw(c2079.17,438.83) 2072.77,445.23 2051.67,424.13 1997.63,424.13 ccw(c1997.63,392.13) 1975,414.76 ccw(c1979.02,410.73) 1973.33,410.73 1973.33,408.3 ccw(c1995.97,385.67) 1963.96,385.67 1963.96,378.93 1963.96,378.09 cw(c1955.42,378.09) 1961.46,372.05 1531.14,372.05 ccw(c1531.14,359.25) 1522.08,368.3 1487.51,333.73 cw(c1434.17,387.08) 1434.17,311.63 1434.17,279.95 ccw(c1509.56,279.95) 1456.25,226.63 cw(c1456.25,217.58) 1462.65,223.98 1468.75,217.88 1468.75,146.8 cw(c1409,146.8) 1451.25,104.55 1389.47,42.77 cw(c1376.67,55.57) 1376.67,37.47 821.31,37.47 cw(c821.31,51.69) 811.25,41.63 769.42,83.46 ccw(c758.75,72.79) 758.75,87.88
GND on Bottom Layer "Bottom Layer-GND" (hatched 90Degree grid 4 track 4, remove dead copper, pour order 72): 953.18,11.3 708.6,11.3 706.52,13.38 706.52,56.3 701.93,60.88 647.77,60.88 640.68,53.8 640.68,17.97 634.02,11.3 499.43,11.3 497.35,13.38 497.35,45.47 491.93,50.88 336.93,50.88 330.27,44.22 330.27,25.47 316.1,11.3 279.02,11.3 272.77,17.55 272.77,172.13 264.43,180.47 19.02,180.47 14.02,185.47 14.02,198.8 15.68,200.47 159.02,200.47 161.1,202.55 161.1,391.72 159.43,393.38 13.6,393.38 13.6,417.97 18.6,422.97 239.43,422.97 246.1,429.63 246.1,573.8 250.68,578.38 322.14,578.38 328.81,571.72 328.81,548.59 337.14,540.26 491.52,540.26 497.14,545.88 497.14,576.3 499.64,578.8 1584.23,578.8 1591.52,571.51 1591.52,546.72 1597.35,540.88 1752.56,540.88 1758.6,546.93 1758.6,577.76 1759.85,579.01 3720.48,579.01 3720.68,579.22 3764.02,573.8 3787.14,567.34 3821.93,557.97 3848.39,550.47 3872.56,545.68 3897.77,543.18 3923.6,542.13 3971.31,540.26 3974.75,536.82 cw(c3970.48,532.55) 3976.52,532.55 3976.52,494.79 ccw(c3995.01,494.79) 3981.93,481.72 4286.6,481.72 cw(c4286.6,461.8) 4300.68,475.88 4300.68,120.87 cw(c4283.61,120.87) 4295.68,108.8 4253.97,108.8 4209.19,108.8 cw(c4209.19,110.22) 4208.18,109.22 4208.18,154.3 ccw(c4188.27,154.3) 4202.35,168.38 4157.09,168.38 ccw(c4157.09,149.89) 4144.02,162.97 4144.02,114.49 cw(c4138.33,114.49) 4142.35,110.47 3988.17,110.47 ccw(c3988.17,93.4) 3976.1,105.47 3976.1,65.63 cw(c3957.61,65.63) 3970.68,52.55 3946.1,49.63 3920.06,49.43 3874.43,46.51 3835.68,39.43 3799.85,29.43 3778.81,22.34 3759.02,17.13 3736.52,14.84 3720.06,12.55 3690.68,10.68 1762.35,11.72 1758.18,14.22 1759.02,41.72 1753.18,50.05 1600.27,50.47 1591.52,44.63 1589.85,25.05 1585.68,17.97 1577.35,11.72 1565.68,12.13
NetC24_1 on Bottom Layer "Bottom Layer-NetU3_24" (hatched 90Degree grid 4 track 4, remove dead copper, pour order 70): 2637.77,347.13 2597.56,347.13 2559.02,385.68 2486.72,385.68 2458.18,357.13 2448.39,347.34 2263.6,347.34 2254.02,356.92 2254.02,401.51 2276.72,424.22 2319.85,424.22 2439.43,424.22 2461.52,446.3 2704.02,446.3 2768.6,381.72 2768.6,338.18 2762.35,331.93 2685.47,331.93 2670.68,346.72
NetC25_1 on Bottom Layer "Bottom Layer-NetU3_21" (hatched 90Degree grid 4 track 4, remove dead copper, pour order 68): 2518.6,376.93 2491.52,376.93 2467.97,353.38 2467.97,350.26 2470.68,347.55 2576.1,347.55 2579.43,350.88 2579.43,352.13 2555.89,375.68
NetC23_1 on Bottom Layer "Bottom Layer-NetU3_28" (hatched 90Degree grid 4 track 4, remove dead copper, pour order 66): 2307.77,255.47 2089.85,255.47 2057.35,287.97 2057.35,382.55 2063.6,388.8 2140.27,388.8 2149.02,380.05 2149.02,344.22 2167.77,325.47 2613.6,325.47 2622.35,334.22 2670.68,334.22 2682.77,322.13 2741.93,322.13 2745.27,318.8 2745.27,305.05 2742.77,302.55 2704.02,302.55 2692.77,291.3 2675.27,273.8 2637.77,273.8 2577.77,273.8 2561.52,257.55
NetC27_1 on Bottom Layer "Bottom Layer-NetR24_2" (hatched 90Degree grid 4 track 4, remove dead copper, pour order 64): 2399.43,161.3 2379.22,161.3 2349.22,191.3 2320.68,191.3 2309.85,202.13 2249.85,202.13 2216.31,168.59 2206.93,159.22 2189.43,159.22 2183.6,153.38 2172.35,153.38 2172.35,155.26 2177.56,160.47 2177.56,167.13 2176.93,167.76 2168.39,176.3 2168.39,179.43 2168.39,224.63 2190.68,246.93 2432.56,246.93 2447.14,232.34 2447.14,161.93 2445.89,160.68
GND on Bottom Layer "Bottom Layer-GND 1" (hatched 90Degree grid 4 track 4, remove dead copper, pour order 62): 2117.97,173.38 2117.97,236.72 2112.97,241.72 2066.52,241.72 2062.35,237.55 2062.35,232.55 2055.89,226.09 2055.27,225.47 2055.27,219.22 2055.27,167.13 2058.18,164.22 2116.93,164.22 2117.77,165.05
VC1 on Bottom Layer "Bottom Layer-VC1" (hatched 90Degree grid 4 track 4, remove dead copper, pour order 60): 371.52,91.72 354.02,91.72 351.1,88.8 350.68,88.38 342.77,88.38 325.06,88.38 324.22,89.22 316.72,96.72 316.72,116.72 316.72,117.97 323.18,124.43 329.85,131.09 332.35,131.09 342.14,131.09 348.81,137.76 386.93,137.76 396.1,128.59 395.89,128.38 395.89,112.76 395.89,100.05 388.81,92.97
NetC12_1 on Bottom Layer "Bottom Layer-NetU10_4" (hatched 90Degree grid 4 track 4, remove dead copper, pour order 58): 400.68,147.97 351.93,147.97 321.93,177.97 321.93,200.47 321.93,242.55 342.77,263.38 430.68,263.38 431.52,262.55 431.52,249.63 428.18,246.3 381.52,246.3 376.93,241.72 376.93,217.13 380.68,213.38 402.77,191.3 420.27,191.3 470.68,191.3 490.68,171.3 552.35,109.63 552.35,85.05 552.35,43.38 546.1,37.13 529.43,37.13 526.52,40.05 498.6,67.97 498.6,83.8 434.85,147.55 423.6,147.55

## Keep-outs
Keep-Out Layer:
  lines w3: 3710.47,0 ccw(c3708.69,160.55) 3756.72,7.34 3828.39,26.93 cw(c3925.32,-298.83) 3894.43,39.63 3957.56,40.68 ccw(c3960.75,65.52) 3985.48,61.51 3985.47,82.97 cw(c4001.72,82.97) 4001.72,99.22 4152.14,99.22 4152.14,144.63 cw(c4171.83,140.31) 4191.52,144.63 4191.52,99.01 4296.31,99.01 ccw(c4293.99,123.39) 4317.51,116.56 4317.51,473.44 4301,489.95 3996.8,489.95 cw(c3996.8,502.32) 3984.43,502.32 3984.43,531.79 ccw(c3968.25,531.79) 3968.25,547.97 3905.68,547.97 cw(c3913.13,814.02) 3834.85,559.63 ccw(c3694.22,239.04) 3727.35,587.55 1747.35,587.55 1747.35,561.65 cw(c1736.16,561.65) 1736.16,550.47 1617.16,550.47 cw(c1617.16,564.86) 1602.77,564.86 1602.77,587.45 488.18,587.45 488.18,564.39 cw(c472.18,564.39) 472.18,548.38 355.08,548.38 cw(c355.08,560.28) 343.18,560.28 343.18,587.55 236.31,587.55 236.31,443.8 cw(c224.22,443.8) 224.22,431.72 10.21,431.72 -0.05,421.46 -0.05,180.57 11.72,168.8 244.36,168.8 cw(c244.36,154.56) 258.6,154.56 258.6,14.56 ccw(c273.11,14.56) 273.11,0.05 343.18,0.05 343.18,23.25 cw(c358.21,23.25) 358.21,38.28 471.71,38.28 cw(c471.71,21.39) 488.6,21.39 488.6,0.05 652.35,0.05 652.35,34.53 cw(c675.37,26.82) 698.39,34.53 698.39,0.05 1602.25,0.05 1602.25,24.01 cw(c1617.77,24.01) 1617.77,39.53 1733.29,39.53 cw(c1733.29,24.63) 1748.18,24.63 1748.18,0 3710.47,0 ; 3797.97,344.63 ccw(c3794.58,361.99) 3795.68,379.63 3552.11,379.63 ccw(c3552.11,354.04) 3526.52,354.04 3526.52,235.05 ccw(c3551.52,235.05) 3551.52,210.05 3797.77,210.05 ccw(c3793.81,227.76) 3797.77,245.47 3556.93,245.47 3556.93,344.63 3797.97,344.63 ; 2875.68,168.38 ccw(c2896.1,181.69) 2916.52,168.38 2916.52,416.72 ccw(c2896.1,405.51) 2875.68,416.72 2875.68,168.38 ; 3014.85,234.63 ccw(c3039.85,234.63) 3039.85,209.63 3286.1,209.63 ccw(c3282.14,227.34) 3286.1,245.05 3045.27,245.05 3045.27,344.22 3286.31,344.22 ccw(c3282.91,361.57) 3284.02,379.22 3040.44,379.22 ccw(c3040.44,353.63) 3014.85,353.63 3014.85,234.63

## Other copper
Top Layer:
  rectangle net NetC24_1: 2304.85,350.47 2376.52,385.88
  rectangle net NetC23_1: 2162.77,354.63 2194.6,367.3
  rectangle net NetC23_1: 2089.43,353.8 2174.85,384.22
  rectangle net GND: 1666.93,171.3 1815.27,317.13
MidLayer1:
  rectangle net GND: 299.22,9.74 321.83,24.53
Bottom Layer:
  rectangle net NetR19_2: 2586.5,459.22 2636.93,491.3
  rectangle net NetR20_2: 2369.02,452.13 2416.93,474.63
  rectangle net VC1: 2042.77,454.63 2071.93,477.97

## Silkscreen, mask and mechanical layers (free items; w line width, h text height)
Top Overlay:
  drawing of 1579 lines, arcs and shapes, not listed
Bottom Overlay:
  lines w6: 399.43,211.09 414.22,211.09 ; 406.93,202.97 406.93,219.43
  text "A" at 12.35,388.38 h30 r270
  text "1" at 11.93,371.72 h30 r270
  text "." at 13.81,361.09 h30 r270
  text "3" at 13.18,338.38 h30 r270
  text "-" at 14.02,309.22 h30 r270
  text "T" at 13.6,285.05 h30 r270
  text "E" at 12.35,258.38 h30 r270
  text "-" at 12.77,228.38 h30 r270
  text "F" at 12.77,201.3 h30 r270
  text "L" at 11.52,176.72 h30 r270
Top Solder:
  drawing of 2409 lines, arcs and shapes, not listed